# Altium PCB regulator.PCBDOC
Units mm, origin at the board's own origin, x right, y up, seen from the top; angles counter-clockwise.
Board outline 42.8 x 56.7 mm, 2 copper layers (TopLayer, BottomLayer); 25 components, 10 nets, 61 pads, 0 vias.
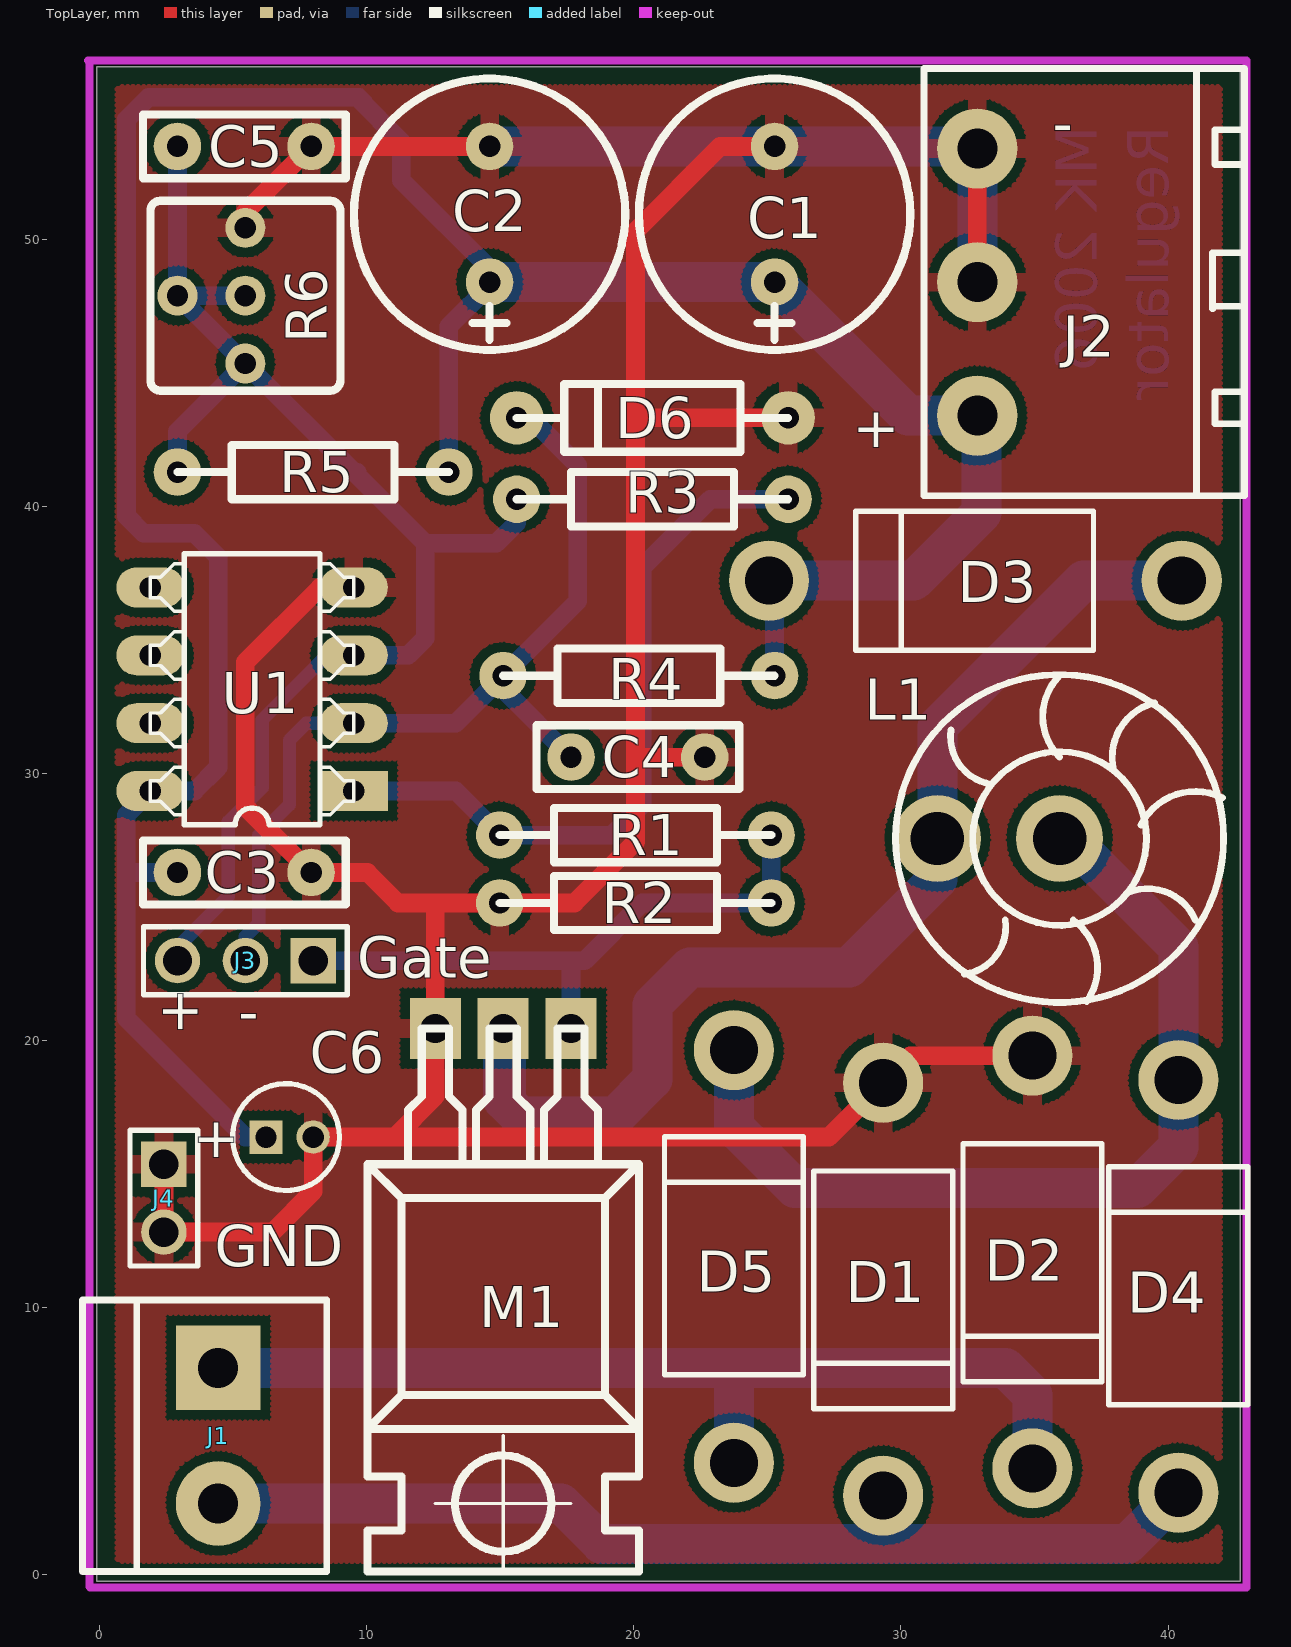
[diagram p0: TopLayer view]
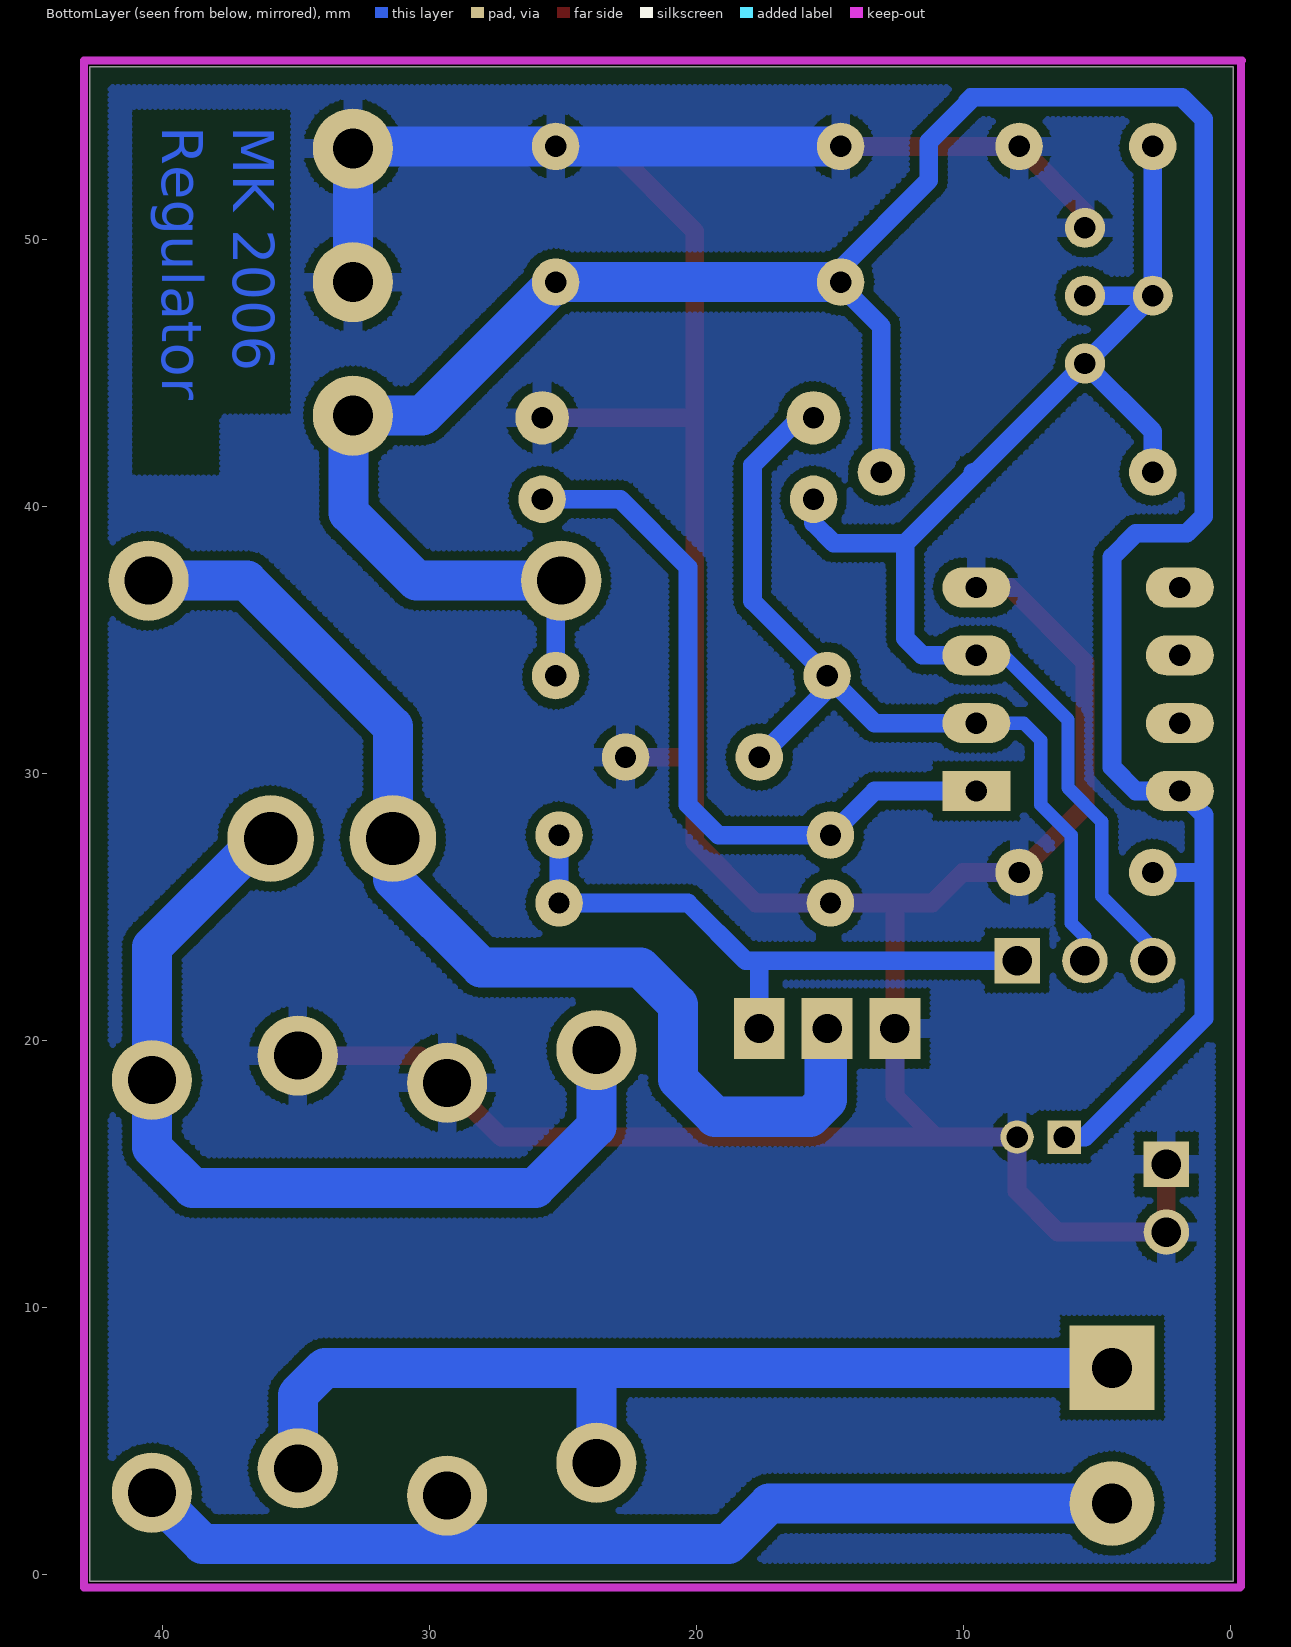
[diagram p1: BottomLayer view, seen from below]

## Layer stack, top to bottom
TopLayer: signal copper 0.0356
Dielectric: core 0.32, FR-4, Dk 4.8
BottomLayer: signal copper 0.0356

## Board outline
-0.093,-0.247 42.707,-0.247 42.707,56.453 -0.093,56.453

## Design rules (kind name [scope] priority, off if disabled: settings)
Clearance [All] p1: gap=0.35
ComponentClearance [All] p1: gap=0.254 collisioncheckmode=0 verticalgap=0.254
PlaneConnect [All] p1: planeconnectstyle=Relief reliefexpansion=0.508 reliefentries=4 reliefconductorwidth=0.7 reliefairgap=0.254
PolygonConnect [All] p1: connectstyle=Relief reliefconductorwidth=0.7 reliefentries=4 polygonreliefangle="90 Angle"
RoutingVias [All] p1: holewidth=0.711 width=1.27 viastyle="Through Hole" minholewidth=0.711 minwidth=1.27 maxholewidth=0.711 maxwidth=1.27
SolderMaskExpansion [All] p1: expansion=0.102
TestPointUsage [All] p1: valid=0 allowmultiple=FALSE
Testpoint [All] p1: side=15 testpointundercomponent=TRUE minsize=1.016 maxsize=2.54 preferedsize=1.524 minholesize=0.508 maxholesize=1.016 preferedholesize=0.813 testpointgrid=0.025 style=1023 order=0-112345678
Width [All] p1: maxlimit=1.5 minlimit=0.25 preferedwidth=0.7
16 further rules are at their usual default settings.

## Components (designator, comment, footprint, x,y, rotation, side; value= is the part's Value field where it differs from the comment)
C1 "220uF" R0.2/0.4 25.273,48.387 r90 top
C2 "220uF" R0.2/0.4 14.605,48.387 r90 top
C3 "100nF" PCM5/2.5 2.921,26.289 r0 top
C4 "100nF" PCM5/2.5 17.653,30.607 r0 top
C5 "100nF" PCM5/2.5 2.921,53.467 r0 top
C6 "10uF" CAPPR1.5-4X5 6.985,16.383 r0 top
D1 "DIODE" DIODE_A 29.337,18.415 r90 top
D2 "DIODE" DIODE_A 34.925,19.431 r90 top
D3 "DIODE" DIODE_A 40.513,37.211 r0 top
D4 "DIODE" DIODE_A 40.386,3.07 r270 top
D5 "DIODE" DIODE_A 23.749,4.191 r270 top
D6 "5V2" DIODE0.4 25.781,43.307 r180 top
J1 "TUNED_CIRCUIT" TER2-0.2 4.445,7.747 r0 top
J2 "OUTPUT" CON3_MALE 30.861,48.387 r270 top
J3 "TestPoints" HDR1X3 8.001,22.987 r180 top
J4 "Ground" HDR1X2 2.413,15.367 r270 top
L1 "TORROID" CONV_IND 35.941,27.559 r180 top
M1 "BUK7560" TO-220F 17.653,20.447 r180 top
R1 "15R" AXIAL0.4 25.146,27.686 r180 top
R2 "1K" AXIAL0.4 14.986,25.146 r0 top
R3 "240k" AXIAL0.4 15.621,40.259 r0 top
R4 "1K" AXIAL0.4 15.113,33.655 r0 top
R5 "10k" AXIAL0.4 2.921,41.275 r0 top
R6 "2K7" VR0.1/4 5.461,45.339 r90 top
U1 "LM358" DIP8 9.525,29.337 r180 top

## Footprints (in the part's own frame and the unit in brackets; to place one, negate y for a bottom-side part, rotate by r counter-clockwise, add the part's x,y. Pads: shape width x height; smd on the part's side, far side on the other; paste and mask are expansions set on the pad)
AXIAL0.4 [mil]
  round 70 hole 31.5: 1(0,0) 2(400,0)
  silkscreen extent 0,-40 400,40
CAPPR1.5-4X5 [mm]
  rect 1.25x1.25 hole 0.8: 1(-0.75,0)
  round 1.25 hole 0.8: 2(1.016,0)
  silkscreen extent -2,-2 2,2
CON3_MALE [mm]
  round 3 hole 1.5: 1(-5,2) 2(0,2) 3(5,2)
  silkscreen extent -8,0 8,12
CONV_IND [mm]
  round 3.25 hole 2: 1(0,0) 2(4.572,0)
  silkscreen extent -6.14,-6.13 6.14,6.13
DIODE0.4 [mil]
  round 79 hole 31.5: A(0,0) K(400,0)
  silkscreen extent 0,-50 400,50
DIODE_A [mm]
  round 3 hole 1.8: 1(0,0) 2(-15.45,0)
  silkscreen extent -12.2,-2.6 -3.3,2.6
DIP8 [mm]
  rect 2.54x1.5 hole 0.8: 1(0,0)
  oval 2.54x1.5 hole 0.8: 2(0,-2.54) 3(0,-5.08) 4(0,-7.62) 5(7.62,-7.62) 6(7.62,-5.08) 7(7.62,-2.54) 8(7.62,0)
  silkscreen extent 0,-8.89 7.62,1.27
HDR1X2 [mm]
  rect 1.7x1.7 hole 1.1: 1(0,0)
  round 1.7 hole 1.1: 2(2.54,0)
  silkscreen extent -1.27,-1.27 3.81,1.27
HDR1X3 [mm]
  rect 1.7x1.7 hole 1.1: 1(0,0)
  round 1.7 hole 1.1: 2(2.54,0) 3(5.08,0)
  silkscreen extent -1.27,-1.27 6.35,1.27
PCM5/2.5 [mil]
  round 70 hole 31.5: 1(0,0) 2(197,0)
  silkscreen extent -51,-47 248,47
R0.2/0.4 [mil]
  round 70 hole 31.5: 1(0,0) 2(200,0)
  silkscreen extent -100,-200 300,200
TER2-0.2 [mm]
  rect 3.175x3.175 hole 1.5: 1(0,0)
  round 3.175 hole 1.5: 2(0,-5.08)
  silkscreen extent -5.08,-7.62 4.06,2.54
TO-220F [mm]
  rect 1.905x2.286 hole 1.1: D(2.54,0) G(0,0) S(5.08,0)
  silkscreen extent -2.54,0 7.62,20.32
VR0.1/4 [mm]
  round 1.5 hole 0.8: 1(0,0) 2(5.08,0) W(2.54,0) W(2.54,2.54)
  silkscreen extent -1.02,-3.56 6.1,3.56

## Nets (pads, with @x,y where several pads share a name; then routed paths per layer and width w, separated by ;. In a path a pad name is that pad's centre, name@x,y a point inside that pad or via, vN(x,y) a via of type N, cw(c..) or ccw(c..) an arc to the next point about the centre after c; other vN are vias at no path point)
GATE_DRIVE: J3.1 M1.G R1.1 R2.2 | length 23.1
  BottomLayer w0.7: J3.1 18.161,22.987 20.32,25.146 R2.2 R1.1 ; M1.G 17.653,22.987
GND: C1.2 C2.2 C3.2 C4.2 C5.2 C6.2 D1.1 D2.1 D6.A J2.1 J2.2 J4.1 J4.2 M1.S R2.1 R6.2 U1.4 | length 160.1
  TopLayer w0.7: J4.1 J4.2 6.477,12.827 8.001,14.351 C6.2 27.305,16.383 30.353,19.431 D2.1 ; R6.2 5.461,51.003 C5.2 C2.2 ; U1.4 8.255,36.957 5.461,34.163 5.461,28.753 C3.2 10.033,26.289 11.176,25.146 17.78,25.146 20.066,27.432 20.066,50.292 23.241,53.467 C1.2 ; 11.049,16.383 12.573,17.907 12.573,25.019 ; 20.066,30.607 C4.2 ; 20.32,43.307 D6.A ; J2.2 J2.1
  BottomLayer w1.2: J2.1 C1.2@25.353,53.387 ; C1.2@25.353,53.387 C1.2 C1.2@25.353,53.387
  BottomLayer w1.5: C2.2 32.781,53.467 J2.1 J2.2
INA: D1.2 D4.1 J1.2 | length 39.3
  BottomLayer w1.5: J1.2 17.282,2.667 18.796,1.153 38.491,1.153 D4.1@40.513,3.175 ; 29.337,1.153 D1.2
INB: D2.2 D5.1 J1.1 | length 37.2
  BottomLayer w1.5: J1.1 33.909,7.747 34.925,6.731 D2.2 ; D5.1 23.749,7.747
NetR1_2: R1.2 R3.2 U1.1 | length 27.5
  BottomLayer w0.7: U1.1 13.335,29.337 R1.2@15.113,27.559 ; R1.2 19.177,27.686 20.32,28.829 20.32,37.719 22.86,40.259 R3.2
RECTA: D4.2 D5.2 L1.1 | length 34.7
  BottomLayer w1.5: D5.2 23.749,16.764 26.035,14.478 38.862,14.478 40.386,16.002 40.386,23.495 36.322,27.559 L1.1
RECTB: D3.1 L1.2 M1.D | length 44.4
  BottomLayer w1.2: 15.367,17.653 M1.D@15.367,20.447
  BottomLayer w1.5: M1.D 15.113,17.78 15.748,17.145 19.304,17.145 20.701,18.542 20.701,21.336 22.098,22.733 28.067,22.733 31.369,26.035 31.369,31.75 36.83,37.211 D3.1
TRG_NEG: C4.1 D6.K J3.2 R4.1 U1.2 | length 33.6
  BottomLayer w0.5: J3.2 5.461,23.876 5.969,24.384 5.969,27.686 7.112,28.829 7.112,31.242 7.747,31.877 U1.2
  BottomLayer w0.7: U1.2 13.335,31.877 17.907,36.449 17.907,41.529 16.129,43.307 D6.K ; R4.1@15.113,33.147 C4.1
TRG_POS: C5.1 J3.3 R3.1 R5.1 R6.1 R6.W U1.3 | length 52
  BottomLayer w0.5: J3.3 2.921,23.495 4.826,25.4 4.826,28.194 6.096,29.464 6.096,32.004 8.509,34.417 U1.3@9.652,34.417
  BottomLayer w0.7: R5.1@2.921,41.783 2.921,42.799 R6.1 ; C5.1 R6.W@2.921,47.879 ; R6.W@5.461,47.879 R6.W@2.921,47.879 ; U1.3 11.557,34.417 12.192,35.052 12.192,38.608 ; 9.652,41.148 9.652,41.275 ; R3.1 15.621,39.37 14.859,38.608 12.192,38.608 ; R6.W@2.921,47.879 12.192,38.608
VCC: C1.1 C2.1 C3.1 C6.1 D3.2 J2.3 R4.2 R5.2 U1.8 | length 110.7
  BottomLayer w0.5: 9.648,55.403 9.748,55.403 9.971,55.18
  BottomLayer w0.7: 1.007,26.289 C3.1 ; C6.1 5.461,16.383 1.007,20.837 1.007,28.439 U1.8 3.556,29.337 4.445,30.226 4.445,38.1 3.556,38.989 1.651,38.989 1.016,39.624 1.016,54.483 1.836,55.303 9.648,55.303 11.303,53.648 11.303,52.197 14.605,48.895 C2.1 ; R5.2 13.081,46.736 C2.1@14.732,48.387 ; R4.2 D3.2@25.273,37.211
  BottomLayer w1.2: J2.3@32.846,43.387 J2.3
  BottomLayer w1.5: C2.1 C1.1 30.273,43.387 32.846,43.387 33.02,43.561 33.02,39.751 30.48,37.211 D3.2
pads on no net: U1.5 U1.6 U1.7

## Polygon pours and split planes (outlines as drawn)
GND on TopLayer (hatched 90Degree grid 0.2 track 0.25, remove dead copper): 0.127,0 42.545,0 42.545,56.261 0.127,56.261
GND on BottomLayer (hatched 90Degree grid 0.2 track 0.25, remove dead copper): 0.127,56.388 42.545,56.388 42.545,-0.127 0.127,-0.127

## Keep-outs
KeepOutLayer:
  lines w0.3: -0.423,56.684 0.157,56.684 42.938,56.684 42.938,-0.478 0.157,-0.478 -0.351,-0.478 ; -0.381,-0.448 -0.381,0.115 -0.381,56.515

## Other copper
BottomLayer:
  text "MK 2006" at 37.338,54.229 h1.52 r90
  text "Regulator" at 40.005,54.229 h1.52 r90

## Silkscreen, mask and mechanical layers (free items; w line width, h text height)
TopOverlay:
  text "-" at 35.687,53.594 h1.52
  text "+" at 28.194,42.203 h1.52
  text "Gate" at 9.652,22.352 h1.52
  text "-" at 5.969,21.463 h1.52 r180
  text "+" at 3.683,20.193 h1.52 r90
  text "GND" at 4.318,11.557 h1.52

## Text inside footprints (layer, text, board x,y; h text height)
C6: TopOverlay "+" at 3.51,15.633 h1.5